# Altium PCB BI_820_Trek_GSM_GPS_hv3.PcbDoc
Units mm, origin at the board's own origin, x right, y up, seen from the top; angles counter-clockwise.
Board outline 71 x 50 mm, 2 copper layers (Top Layer, Bottom Layer); 47 components, 39 nets, 196 pads, 223 vias.
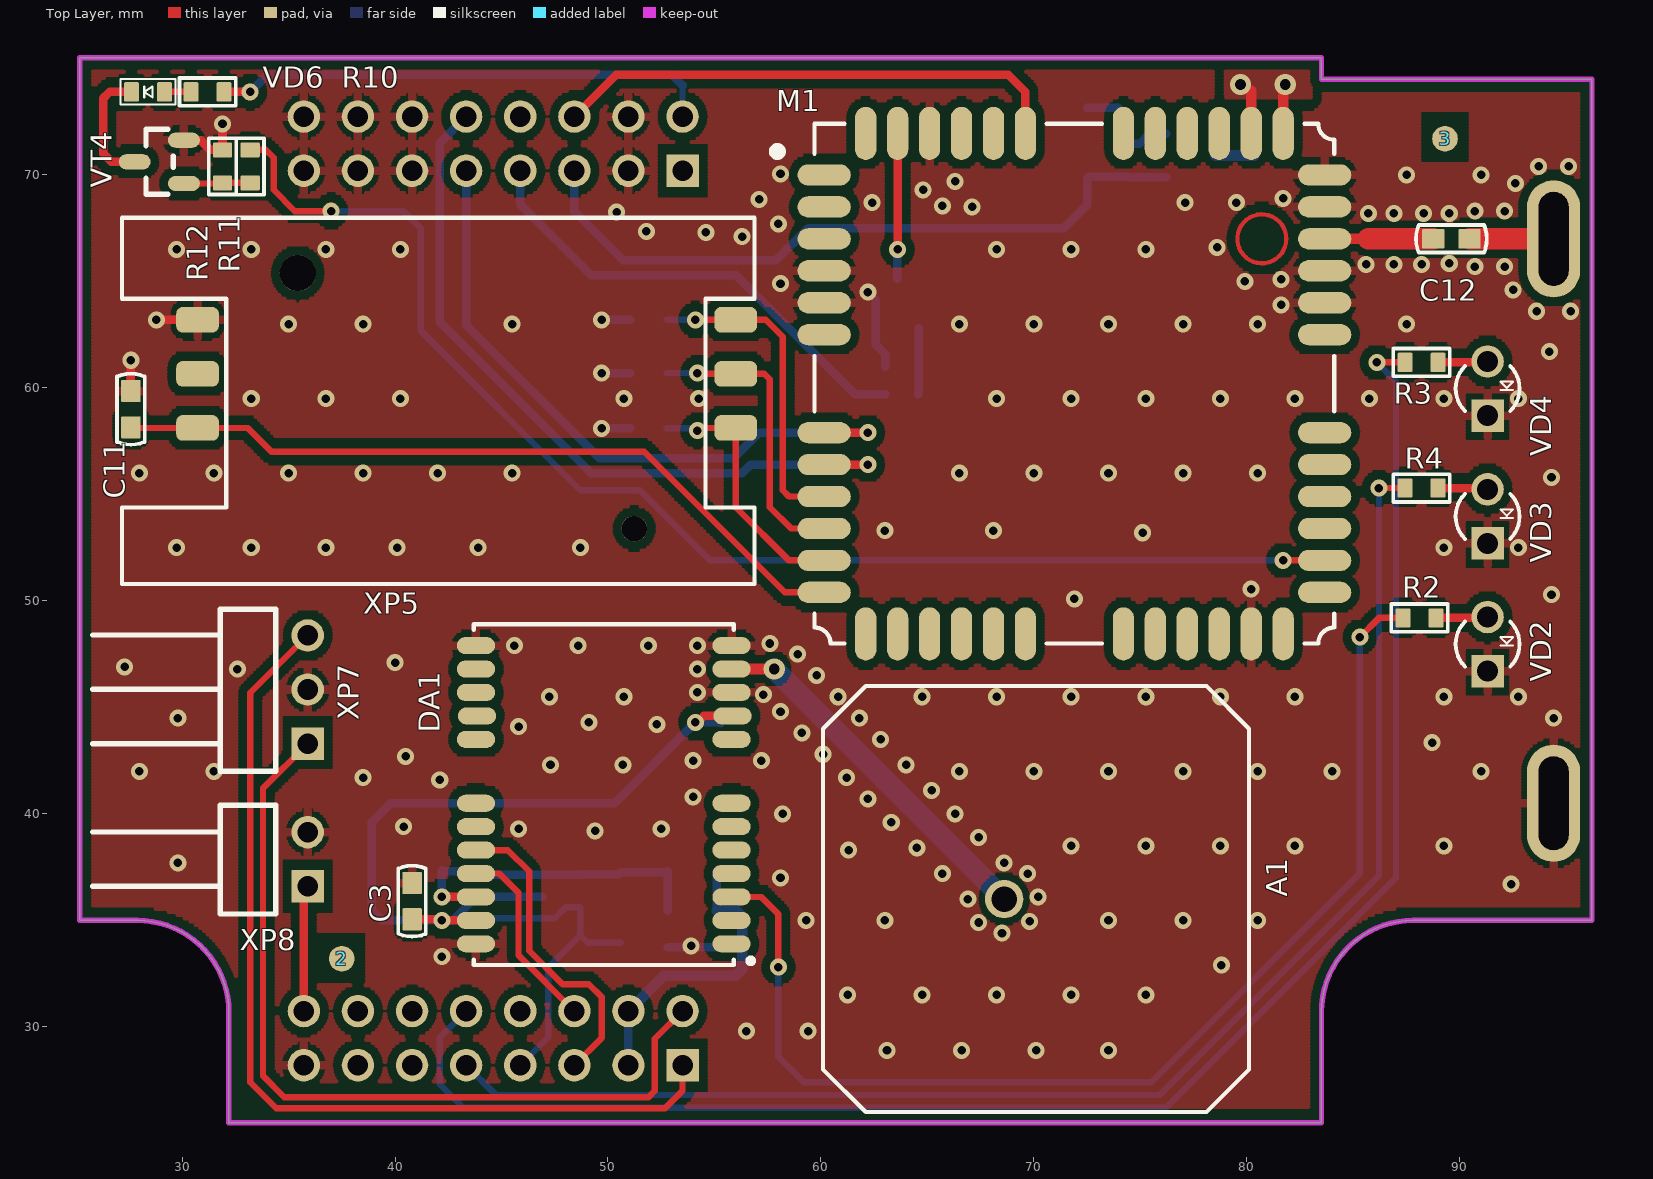
[diagram p0: Top Layer view]
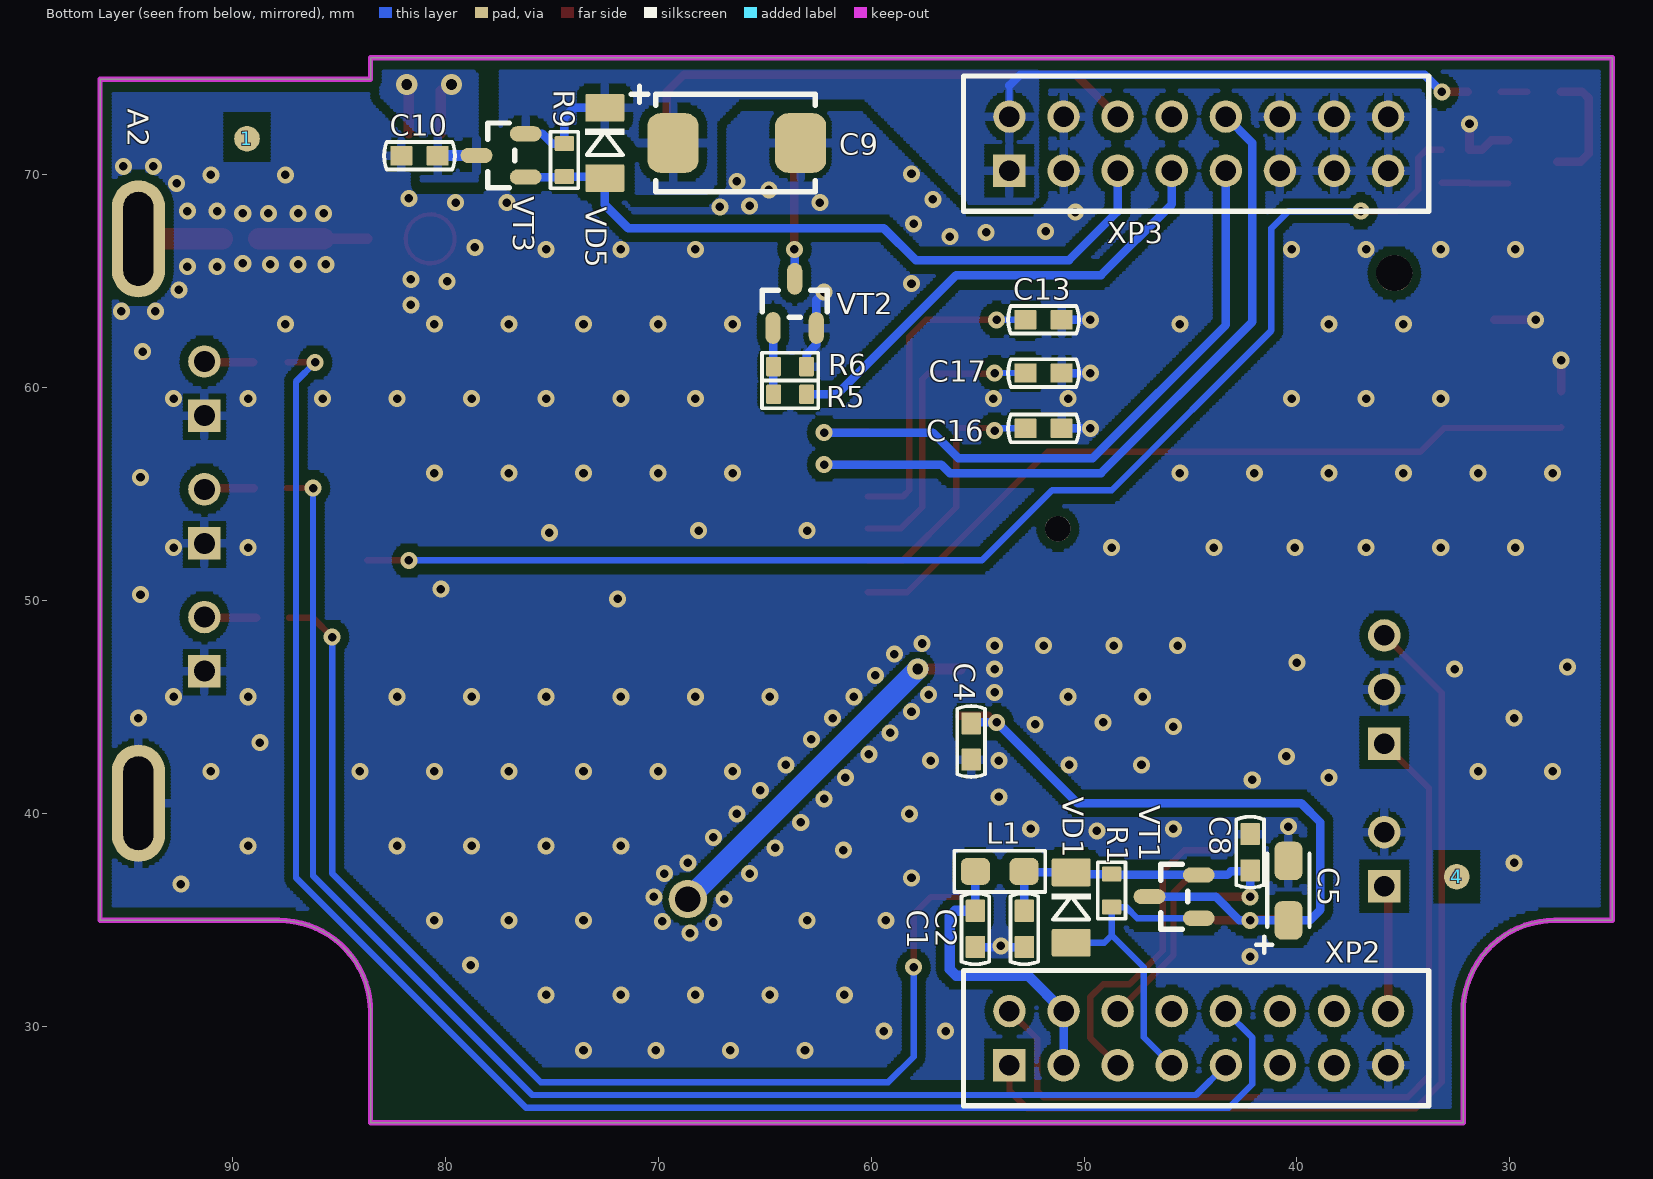
[diagram p1: Bottom Layer view, seen from below]

## Layer stack, top to bottom
Top Solder: solder mask 0.0102, Solder Resist, Dk 3.5
Top Layer: signal copper 0.0356
Dielectric1: dielectric 0.32, FR-4, Dk 4.8
Bottom Layer: signal copper 0.0356
Bottom Solder: solder mask 0.0102, Solder Resist, Dk 3.5

## Board outline
32.2,30.7 ccw(c27.9,30.7) 27.9,35 25.2,35 25.2,75.5 83.5,75.5 83.5,74.5 96.2,74.5 96.2,35 87.8,35 ccw(c87.8,30.7) 83.5,30.7 83.5,25.5 32.2,25.5

## Design rules (kind name [scope] priority, off if disabled: settings)
Clearance Clearance_MH [HasPad('Free-1') vs InPoly] p1: gap=2
Clearance Clearance_keepout [IsKeepOut] p2: gap=0.4
Clearance Clearance_RF [InNet('NetC12_1') Or InNet('NetA1_1') vs InPoly] p3: gap=0.3
Clearance Clearance_Poly [All vs InPoly] p4: gap=0.4
Clearance [All] p5: gap=0.2
ComponentClearance [All] p1: gap=0 collisioncheckmode=3 verticalgap=0 showdistances=FALSE
HoleSize [All] p1: absolutevalues=TRUE maxlimit=9 minlimit=0.025 maxpercent=80.000 minpercent=20.000
MinimumSolderMaskSliver [All] p1: minsoldermaskwidth=0.076
PlaneConnect [All] p1: planeconnectstyle=Relief reliefexpansion=0.2 reliefentries=4 reliefconductorwidth=0.254 reliefairgap=0.2
PolygonConnect PolygonConnect_Thermal [PadYSize_TopLayer > 3] p1: connectstyle=Direct reliefconductorwidth=0.254 reliefentries=4 polygonreliefangle="90 Angle" airgapwidth=0.254
PolygonConnect PolygonConnect_VIA [IsVia] p2: connectstyle=Direct reliefconductorwidth=0.254 reliefentries=4 polygonreliefangle="90 Angle" airgapwidth=0.254
PolygonConnect [All] p3: connectstyle=Relief reliefconductorwidth=0.4 reliefentries=4 polygonreliefangle="90 Angle" airgapwidth=0.254
RoutingVias [All] p1: holewidth=0.3 width=0.6 viastyle="Through Hole" minholewidth=0.3 minwidth=0.6 maxholewidth=0.5 maxwidth=1
SilkToSilkClearance [All] p1: silktosilkclearance=0
SilkToSolderMaskClearance SilkscreenOverComponentPads [IsPad] p1: minsilkscreentomaskgap=0.05 clearancetoexposedcopper=TRUE
SolderMaskExpansion SolderMaskExpansion_VIA [IsVia] p1: expansion=-25.4
SolderMaskExpansion SolderMaskExpansion_1 [IsPad And PadYSize_TopLayer < 0.4] p2: expansion=0.05
SolderMaskExpansion [All] p3: expansion=0.076
Width [All] p1: maxlimit=1.5 minlimit=0.2 preferedwidth=0.3
24 further rules are at their usual default settings.

## Classes and differential pairs
component class GPS: A1 C1 C2 C3 C4 C5 C8 DA1 L1 R1 R2 R3 R4 VD1 VD2 VD3 VD4 VT1 XP2 XP7 XP8
component class GSM: A2 C9 C10 C11 C12 C13 C16 C17 M1 R5 R6 R9 R10 R11 R12 VD5 VD6 VT2 VT3 VT4 XP3 XP5

## Components (designator, comment, footprint, x,y, rotation, side; value= is the part's Value field where it differs from the comment)
1 "Comment" REPER1.2 89.3,71.7 r180 bottom
2 "Comment" REPER1.2 37.5,33.2 r0 top
3 "Comment" REPER1.2 89.3,71.7 r0 top
4 "Comment" REPER1.2 32.5,37.05 r180 bottom
A1 "BY-GPS-204" BY-GPS-204 68.6,36 r90 top
A2 "GSM_antenna_pad" GSM_antenna_pad 94.4,67 r270 bottom
C1 "0.1 uF" CC0603-3M 55.1,34.6 r90 bottom
C2 "0.1 uF" CC0603-3M 52.8,34.6 r90 bottom
C3 "0.1 uF" CC0603-3M 40.8,35.9 r90 top
C4 "0.1 uF" CC0603-3M 55.3,43.4 r270 bottom
C5 "10uF x 6.3V" TAJ-A_M 40.4,35 r90 bottom
C8 "1 uF" CC0603-3M 42.2,38.2 r270 bottom
C9 "470uF x 6.3V" TAJ-D-1M 66.3,71.5 r180 bottom
C10 "1 uF" CC0603-3M 81.2,70.9 r180 bottom
C11 "33 pF" CC0603-3M 27.6,59 r270 top
C12 "10 pF" CC0603-3M 89.6,67 r0 top
C13 "33 pF" CC0603-3M 51.9,63.2 r0 bottom
C16 "33 pF" CC0603-3M 51.9,58.1 r0 bottom
C17 "33 pF" CC0603-3M 51.9,60.7 r0 bottom
DA1 "SL869_V2" SL868 55.8,33.9 r180 top
L1 "10 uH" RC0805-MIDI-2 55.1,37.3 r180 bottom
M1 "GL868-DUAL" GL868-DUAL 71.9,60.2 r0 top
R1 "10k" RC0603-3M 48.7,36.4 r270 bottom
R2 "330" RC0603-3M 88.1,49.2 r0 top
R3 "560" RC0603-3M 88.2,61.2 r180 top
R4 "330" RC0603-3M 88.2,55.3 r180 top
R5 "10k" RC0603-3M 63.8,59.7 r0 bottom
R6 "47k" RC0603-3M 63.8,61 r180 bottom
R9 "10k" RC0603-3M 74.4,70.7 r270 bottom
R10 "390" RC0603-3M 31.2,73.9 r0 top
R11 "10k" RC0603-3M 33.2,70.4 r270 top
R12 "47k" RC0603-3M 31.9,70.4 r90 top
VD1 "BZV55C5V6" SOD80 50.6,35.6 r270 bottom
VD2 "BL-B21V1L" LED3 91.3,46.7 r90 top
VD3 "BL-B31V1-L" LED3 91.3,52.7 r90 top
VD4 "BL-B45V1-L" LED3 91.3,58.7 r90 top
VD5 "BZV55C5V6" SOD80 72.5,71.5 r270 bottom
VD6 "LGQ971-Z" LED0603 28.4,73.9 r180 top
VT1 "IRLML6402" SOT-23(123) 44.6,35.1 r180 bottom
VT2 "BC846BLT1" SOT-23(123) 64.6,62.8 r270 bottom
VT3 "IRLML6402" SOT-23(123) 76.2,69.9 r180 bottom
VT4 "BC846BLT1" SOT-23(123) 30.1,69.6 r0 top
XP2 "PLD-16" PIN16 53.5,28.2 r180 bottom
XP3 "PLD-16" PIN16 53.5,70.2 r180 bottom
XP5 "SCV-W06A25-020" SCVW06A25020 56,63.2 r180 top
XP7 "PLS-03L" PLS-03L 35.9,43.3 r90 top
XP8 "PLS-02L" PLS-02L 35.9,36.6 r90 top

## Footprints (in the part's own frame and the unit in brackets; to place one, negate y for a bottom-side part, rotate by r counter-clockwise, add the part's x,y. Pads: shape width x height; smd on the part's side, far side on the other; paste and mask are expansions set on the pad)
BY-GPS-204 [mm]
  round 1.8 hole 1.2: 1(0,0)
  silkscreen extent -10,-11.5 10,8.5
CC0603-3M [mil]
  rrect10% 40.98x35.98 smd paste-1000: 1(-33.5,0) 2(33.5,0)
  silkscreen extent -65,-26 65,26
GL868-DUAL [mm]
  oval 2.5x1 smd: 1(-11.75,9.8) 2(-11.75,8.3) 3(-11.75,6.8) 4(-11.75,5.3) 5(-11.75,3.8) 6(-11.75,2.3) 7(-11.75,-2.3) 8(-11.75,-3.8) 9(-11.75,-5.3) 10(-11.75,-6.8) 11(-11.75,-8.3) 12(-11.75,-9.8) 25(11.75,-9.8) 26(11.75,-8.3) 27(11.75,-6.8) 28(11.75,-5.3) 29(11.75,-3.8) 30(11.75,-2.3) 31(11.75,2.3) 32(11.75,3.8) 33(11.75,5.3) 34(11.75,6.8) 35(11.75,8.3) 36(11.75,9.8)
  oval 1x2.5 smd: 13(-9.8,-11.75) 14(-8.3,-11.75) 15(-6.8,-11.75) 16(-5.3,-11.75) 17(-3.8,-11.75) 18(-2.3,-11.75) 19(2.3,-11.75) 20(3.8,-11.75) 21(5.3,-11.75) 22(6.8,-11.75) 23(8.3,-11.75) 24(9.8,-11.75) 37(9.8,11.75) 38(8.3,11.75) 39(6.8,11.75) 40(5.3,11.75) 41(3.8,11.75) 42(2.3,11.75) 43(-2.3,11.75) 44(-3.8,11.75) 45(-5.3,11.75) 46(-6.8,11.75) 47(-8.3,11.75) 48(-9.8,11.75)
  Top Layer circle w0.2: c8.8,6.8 r1.15
  silkscreen extent -14.15,-12.2 12.2,12.2
GSM_antenna_pad [mm]
  oval 5.5x2.5 hole 1.4 slot 4.4 at 0 deg: 1(0,0) 2(26.5,0)
LED3 [mil]
  rect 60x60 hole 39: 1(0,0)
  round 60 hole 39: 2(100,0)
  silkscreen extent 8,-59 92,59
LED0603 [mm]
  rrect20% 0.71x0.91 smd paste-25.4: 1(-0.775,0) 2(0.775,0)
  silkscreen extent -1.3,-0.6 1.3,0.6
PIN16 [mil]
  rect 60x60 hole 38: 1(0,0)
  round 60 hole 38: 2(0,100) 3(100,0) 4(100,100) 5(200,0) 6(200,100) 7(300,0) 8(300,100) 9(400,0) 10(400,100) 11(500,0) 12(500,100) 13(600,0) 14(600,100) 15(700,0) 16(700,100)
  silkscreen extent -85,-75 775,175
PLS-02L [mil]
  rect 60x60 hole 38: 1(0,0)
  round 60 hole 38: 2(100,0)
  silkscreen extent -51,59 150,398
PLS-03L [mil]
  rect 60x60 hole 38: 1(0,0)
  round 60 hole 38: 2(100,0) 3(200,0)
  silkscreen extent -51,59 248,398
RC0603-3M [mm]
  rrect20% 0.71x0.91 smd paste-25.4: 1(-0.775,0) 2(0.775,0)
  silkscreen extent -1.32,-0.65 1.33,0.65
RC0805-MIDI-2 [mil]
  rrect50% 54x50 smd: 1(0,0) 2(90,0)
  silkscreen extent -39,-38 129,38
REPER1.2 [mm]
  round 1.2 smd paste-25.4 mask-25.4: 1(0,0)
  Top Layer pour cut-out: -1.2,-1.2 1.2,-1.2 1.2,1.2 -1.2,1.2
SCVW06A25020 [mm]
  rrect50% 2x1.2 smd: 1(0,0) 2(0,2.54) 3(0,5.08) 4(25.273,0) 5(25.273,2.54) 6(25.273,5.08)
  round 1.2 hole 1.2 unplated: 7(4.769,9.81)
  round 1.7 hole 1.7 unplated: 8(20.569,-2.19)
  silkscreen extent -0.88,-4.79 28.82,12.41
SL868 [mm]
  oval 1.8x0.8 smd: 1(0,0) 2(0,-1.1) 3(0,-2.2) 4(0,-3.3) 5(0,-4.4) 6(0,-5.5) 7(0,-6.6) 8(0,-9.6) 9(-0.05,-10.7) 10(0,-11.8) 11(0,-12.9) 12(0,-14) 13(12,-14) 14(12,-12.9) 15(12,-11.8) 16(11.95,-10.7) 17(12,-9.6) 18(12,-6.6) 19(12,-5.5) 20(12,-4.4) 21(12,-3.3) 22(12,-2.2) 23(12,-1.1) 24(12,0)
  silkscreen extent -1.03,-15 12.1,1
SOD80 [mm]
  rrect10% 1.3x1.83 smd paste-25.4: 1(1.651,0) 2(-1.651,0)
  silkscreen extent -0.66,-0.91 0.56,0.91
SOT-23(123) [mil]
  oval 59.06x28.07 smd: 1(-0.5,0) 2(-0.5,80) 3(-91.5,40)
  silkscreen extent -70,-20 -20,100
TAJ-A_M [mm]
  rrect50% 1.8x1.3 smd: 1(0,0) 2(2.794,0)
  silkscreen extent -1.52,-0.99 3.12,1.52
TAJ-D-1M [mm]
  rrect50% 2.4x2.8 smd: 1(-2.997,0) 2(2.997,0)
  silkscreen extent -4.95,-2.29 3.68,2.67

## Part data
A1: "Passive GPS Antenna"
C1 C2 C3 C4 C8 C10 C11 C12 C13 C16 C17: library part CC0603, "CC0603"
C5: library part TAJ-A, "TAJ-A"
C9: library part TAJ-D, "TAJ-D"
L1: library part L0805, "L0805"
R1 R2 R3 R4 R5 R6 R9 R10 R11 R12: library part RC0603, "RC0603"
VD1 VD5: library part BZV55C5V1, "Zener Voltage Regulator Diode"
VD2 VD3 VD4: library part LED_3, "LED_3"
VD6: library part LED_0603, "LED_0603"
VT1 VT3: "HEXFET Power MOSFET"

## Via types
v1: diameter 0.8, hole 0.4, Top Layer to Bottom Layer, 220 vias
v2: diameter 1, hole 0.5, Top Layer to Bottom Layer, 3 vias

## Nets (pads, with @x,y where several pads share a name; then routed paths per layer and width w, separated by ;. In a path a pad name is that pad's centre, name@x,y a point inside that pad or via, vN(x,y) a via of type N, cw(c..) or ccw(c..) an arc to the next point about the centre after c; other vN are vias at no path point)
+3V: C1.2 L1.1 XP2.3 XP2.4 | length 14.3
  Bottom Layer w0.4: XP2.3 XP2.4 ; C1.2 L1.1
  Bottom Layer w0.5: XP2.4 52.62,32.4 56,32.4 56.3,32.7 56.3,35.2 56.049,35.451 C1.2
GND: A2.2 C1.1 C2.1 C3.2 C4.2 C5.2 C8.1 C9.2 C10.1 C11.1 C13.1 C16.1 C17.1 DA1.10 DA1.12 DA1.13 DA1.24 M1.4 M1.5 M1.23 M1.32 M1.33 M1.35 M1.36 M1.46 R6.2 R12.2 VD2.1 VD3.1 VD4.1 VT2.2 VT4.2 XP2.15 XP3.3 XP3.4 XP3.11 XP3.12 XP3.13 XP3.14 XP3.15 XP3.16 XP5.4 XP7.2 XP8.2 | length 16.8
  Top Layer w0.4: C11.1 v1(27.6,61.3) ; v1(28.8,63.2) XP5.4 ; VT4.2 30.868,71.632 31.325,71.175 R12.2 v1(31.9,72.4)
  Bottom Layer w0.4: v1(49.7,58.1) C16.1 ; v1(49.7,60.7) C17.1 ; v1(49.7,63.2) C13.1 ; C2.1 C1.1 ; v1(62.2,64.5) 62.568,64.132 VT2.2 62.568,62.032 63.025,61.575 R6.2
  other v1: 63.1,28.9 66.6,28.9 70.1,28.9 73.5,28.9 56.5,29.8 59.4,29.8 61.25,31.5 64.75,31.5 68.25,31.5 71.75,31.5 75.25,31.5 78.8,32.9 42.2,33.3 53.9,33.8 68.5,34.4 67.4,34.9 69.8,34.95 59.3,35 63,35 73.5,35 77,35 80.5,35 66.9,36 70.2,36.1 92.4,36.7 58.1,37 65.7,37.2 69.7,37.2 29.8,37.7 68.6,37.7 61.3,38.3 64.5,38.4 71.75,38.5 75.25,38.5 78.75,38.5 82.25,38.5 89.25,38.5 67.4,38.9 49.4,39.2 45.8,39.3 52.5,39.3 40.4,39.4 63.3,39.6 58.2,40 66.3,40 62.2,40.7 54,40.8 65.2,41.1 42.1,41.6 38.5,41.7 61.2,41.7 28,42 31.5,42 66.5,42 70,42 73.5,42 77,42 80.5,42 84,42 91,42 47.3,42.3 50.7,42.3 64,42.3 54,42.5 57.2,42.5 40.5,42.7 60.1,42.8 88.7,43.35 62.8,43.5 59.1,43.8 45.8,44.1 52.3,44.2 49.1,44.3 29.8,44.5 61.8,44.5 94.4,44.5 58.1,44.8 47.25,45.5 50.75,45.5 60.8,45.5 64.75,45.5 68.25,45.5 71.75,45.5 75.25,45.5 78.75,45.5 82.25,45.5 89.25,45.5 92.75,45.5 57.3,45.6 54.2,45.7 59.8,46.5 32.6,46.8 54.2,46.8 27.3,46.9 40,47.1 58.9,47.5 45.6,47.9 48.6,47.9 51.9,47.9 54.2,47.9 57.6,48 71.9,50.1 94.3,50.3 80.2,50.55 29.75,52.5 33.25,52.5 36.75,52.5 40.1,52.5 43.9,52.5 48.7,52.5 89.25,52.5 92.75,52.5 75.1,53.2 63,53.3 68.1,53.3 94.3,55.8 28,56 31.5,56 35,56 38.5,56 42,56 45.5,56 66.5,56 70,56 73.5,56 77,56 80.5,56 33.25,59.5 36.75,59.5 40.25,59.5 50.75,59.5 54.25,59.5 68.25,59.5 71.75,59.5 75.25,59.5 78.75,59.5 82.25,59.5 85.75,59.5 89.25,59.5 92.75,59.5 94.2,61.7 35,63 38.5,63 45.5,63 66.5,63 70,63 73.5,63 77,63 80.5,63 87.5,63 93.6,63.6 95.2,63.6 81.6,63.9 92.5,64.6 58.1,64.9 79.9,65 81.6,65.1 90.7,65.7 92.1,65.7 85.6,65.8 86.9,65.8 88.2,65.8 89.5,65.85 29.75,66.5 33.25,66.5 36.75,66.5 40.25,66.5 68.25,66.5 71.75,66.5 75.25,66.5 78.6,66.6 56.3,67.1 54.6,67.3 51.8,67.35 58,67.7 85.7,68.2 86.9,68.2 88.3,68.2 89.5,68.2 50.4,68.25 90.7,68.3 92.1,68.3 67.1,68.5 65.7,68.55 62.4,68.7 77.1,68.7 79.5,68.7 57.1,68.85 81.7,68.9 64.8,69.3 92.6,69.6 66.3,69.7 87.5,70 91,70 58.1,70.05 93.7,70.4 95.1,70.4
GPS_ON: R1.2 VD1.1 VT1.1 XP2.7 | length 14.9
  Bottom Layer w0.3: VT1.1 47.5,35.1 48.025,35.625 R1.2 48.7,34.3 ; XP2.7 47.2,29.52 47.2,32.8 48.7,34.3 ; VD1.1 49.051,33.949 48.7,34.3
GPS_RX: DA1.21 XP2.6 | length 9
  Top Layer w0.3: DA1.21 44.9,37.2 45.8,36.3 45.8,33.36 XP2.6
GPS_TX: DA1.20 XP2.5 | length 14.7
  Top Layer w0.3: DA1.20 45.3,38.3 46.3,37.3 46.3,33.567 47.867,32 49.1,32 49.7,31.4 49.7,29.48 XP2.5
GPS_VCC: C3.1 C4.1 C5.1 DA1.9 DA1.23 VT1.3 | length 36.1
  Top Layer w0.4: C3.1 42.151,35.049 v1(42.2,35) DA1.23 ; v1(54.1,44.3) 54.2,44.3 54.5,44.6 DA1.9
  Bottom Layer w0.4: VT1.3 43.816,36.116 42.7,35 v1(42.2,35) C5.1 39.4,35 38.9,35.5 38.9,39.6 39.8,40.5 50.3,40.5 v1(54.1,44.3) 55.251,44.3 C4.1
GSM_ON: R9.2 VD5.1 VT3.1 XP3.5 | length 33
  Bottom Layer w0.4: XP3.5 48.42,68.28 50.7,66 57.9,66 59.4,67.5 71.4,67.5 72.5,68.6 VD5.1 72.576,69.925 R9.2 74.425,69.9 VT3.1
NetA1_1: A1.1 DA1.11 | length 17.3
  Top Layer w0.5: DA1.11 v2(57.8,46.8)
  Bottom Layer w1: v2(57.8,46.8) A1.1
NetA2_1: A2.1 C12.2 | length 3.9
  Top Layer w1: C12.2 A2.1
NetC10_2: C10.2 M1.37 M1.38 VT3.3 | length 5.8
  Top Layer w0.5: M1.38 80.2,73.95 ; M1.37 v2@81.7,73.95
  Bottom Layer w0.5: VT3.3 80.333,70.916 C10.2
  other v2: 79.7,74.25 81.8,74.25
NetC12_1: C12.1 M1.34 | length 5.1
  Top Layer w0.5: M1.34 85.7,67
  Top Layer w1: 85.7,67 C12.1
NetDA1_3: DA1.3 R2.1 | length 54.6
  Top Layer w0.3: DA1.3 57.2,36.1 58,35.3 v1(58,32.8) ; v1(85.3,48.3) 86.2,49.2 R2.1
  Bottom Layer w0.3: v1(58,32.8) 58,28.6 59.2,27.4 75.5,27.4 85.3,37.2 v1(85.3,48.3)
NetM1_26: M1.26 R11.1 | length 62.1
  Top Layer w0.3: R11.1 33.925,71.175 34.3,70.8 34.3,69.3 35.3,68.3 v1(37,68.3) ; v1(81.7,51.9) M1.26
  Bottom Layer w0.3: v1(37,68.3) 40.4,68.3 41.2,67.5 41.2,62.7 48.7,55.2 51.5,55.2 54.8,51.9 v1(81.7,51.9)
NetM1_47: M1.47 VT2.3 | length 6.8
  Top Layer w0.4: v1(63.6,66.5) M1.47
  Bottom Layer w0.4: VT2.3 63.584,66.484 v1(63.6,66.5)
NetR2_2: R2.2 VD2.2 | length 2.5
  Top Layer w0.4: R2.2 91.26,49.2 VD2.2 ; VD2.2@91.26,48.8 VD2.2@91.3,48.84
NetR3_1: R3.1 VD4.2 | length 2.4
  Top Layer w0.4: R3.1@89,61.2 90.94,61.2 VD4.2@91.3,60.84
NetR4_1: R4.1 VD3.2 | length 2.4
  Top Layer w0.4: R4.1 91.24,55.3 VD3.2 ; VD3.2@91.24,54.9 VD3.2@91.3,54.84
NetR5_1: R5.1 XP3.7 | length 22.4
  Bottom Layer w0.4: XP3.7 45.88,68.62 49.2,65.3 56,65.3 61.6,59.7 R5.1
NetR5_2: R5.2 R6.1 VT2.1 | length 3.1
  Bottom Layer w0.4: R5.2 64.6,59.725 VT2.1
NetR10_1: R10.1 VD6.1 | length 1.3
  Top Layer w0.3: VD6.1 R10.1
NetR11_2: R11.2 R12.1 VT4.1 | length 3.1
  Top Layer w0.3: VT4.1 31.875,69.6 R12.1 R11.2
NetVD6_2: VD6.2 VT4.3 | length 5.7
  Top Layer w0.4: VD6.2 26.6,73.9 26.3,73.6 26.3,71 26.684,70.616 VT4.3
NetXP2_8: XP2.8
PWRMON: M1.43 XP3.6 | length 24.3
  Top Layer w0.4: XP3.6 50.38,74.7 68.8,74.7 69.6,73.9 M1.43
RTC_VCC: C2.2 C8.2 DA1.22 L1.2 R1.1 VD1.2 VT1.2 | length 15.5
  Top Layer w0.4: v1(42.2,36.1) DA1.22
  Bottom Layer w0.4: v1(42.2,36.1) C8.2 42.249,37.3 43.1,37.3 43.268,37.132 VT1.2 48.657,37.132 R1.1 50.524,37.175 VD1.2 52.765,37.251 L1.2 52.814,35.465 C2.2
RXD: M1.8 XP3.10 | length 35.4
  Top Layer w0.4: M1.8 v1(62.2,56.4)
  Bottom Layer w0.4: XP3.10 42.1,71.5 42.1,63.1 49.2,56 56.3,56 56.7,56.4 v1(62.2,56.4)
RXD0: XP2.2 XP7.1 | length 39.7
  Top Layer w0.3: XP7.1 33.8,41.2 33.8,27.7 34.8,26.7 51.9,26.7 52.2,27 52.2,29.44 XP2.2
RXD_AUX: M1.44
SIMCLK: C16.2 M1.11 XP5.3 | length 12.2
  Top Layer w0.3: v1(54.2,58) 54.32,58.12 XP5.3 56,54.4 58.5,51.9 M1.11
  Bottom Layer w0.3: C16.2 54.1,58.1 v1(54.2,58)
SIMIO: C11.2 M1.12 XP5.6 | length 35.8
  Top Layer w0.3: C11.2 27.629,58.12 XP5.6 33.08,58.12 34.2,57 51.7,57 58.3,50.4 M1.12
SIMRST: C17.2 M1.10 XP5.2 | length 13.9
  Top Layer w0.3: v1(54.2,60.7) 54.24,60.66 XP5.2 57.34,60.66 57.6,60.4 57.6,54.4 58.6,53.4 M1.10
  Bottom Layer w0.3: C17.2 v1(54.2,60.7)
SIMVCC: C13.2 M1.9 XP5.1 | length 15.1
  Top Layer w0.3: v1(54.1,63.2) XP5.1 57.4,63.2 58.2,62.4 58.2,55.2 58.5,54.9 M1.9
  Bottom Layer w0.3: C13.2 v1(54.1,63.2)
STAT_LED: R4.2 XP2.9 | length 67.1
  Top Layer w0.3: v1(86.2,55.3) R4.2
  Bottom Layer w0.3: XP2.9 44.74,26.8 75.9,26.8 86.2,37.1 v1(86.2,55.3)
TST: XP2.16 XP8.1 | length 6
  Top Layer w0.4: XP2.16 35.72,36.42 XP8.1
  Bottom Layer w0.4: XP2.16@35.68,30.7 XP2.16
TXD: M1.7 XP3.9 | length 31.2
  Top Layer w0.4: M1.7 v1(62.2,57.9)
  Bottom Layer w0.4: XP3.9 43.34,62.96 49.6,56.7 55.9,56.7 57.1,57.9 v1(62.2,57.9)
TXD0: XP2.1 XP7.3 | length 44.4
  Top Layer w0.3: XP7.3 33.2,45.68 33.2,27.4 34.423,26.177 52.677,26.177 53.5,27 XP2.1
TXD_AUX: M1.45
V_SD: R3.2 XP2.10 | length 79.7
  Top Layer w0.3: v1(86.1,61.2) R3.2@87.4,61.2
  Bottom Layer w0.3: XP2.10 42.1,29.5 42.1,27.3 43.2,26.2 76.2,26.2 87,37 87,60.3 v1(86.1,61.2)
VCC: C9.1 R9.1 R10.2 VD5.2 VT3.2 XP3.1 XP3.2 | length 28.8
  Top Layer w0.4: R10.2 v1(33.2,73.9)
  Bottom Layer w0.3: XP3.2 53.5,74.2
  Bottom Layer w0.4: v1(33.2,73.9) 34,74.7 53,74.7 53.5,74.2 ; VD5.2 73.949,73.151 74.4,72.7 R9.1 74.975,71.475 75.432,71.932 VT3.2
pads on no net: 1.1 2.1 3.1 4.1 DA1.1 DA1.2 DA1.4 DA1.5 DA1.6 DA1.7 DA1.8 DA1.14 DA1.15 DA1.16 DA1.17 DA1.18 DA1.19 M1.1 M1.2 M1.3 M1.6 M1.13 M1.14 M1.15 M1.16 M1.17 M1.18 M1.19 M1.20 M1.21 M1.22 M1.24 M1.25 M1.27 M1.28 M1.29 M1.30 M1.31 M1.39 M1.40 M1.41 M1.42 M1.48 XP2.11 XP2.12 XP2.13 XP2.14 XP3.8 XP5.5 XP5.7 XP5.8

## Polygon pours and split planes (outlines as drawn)
NetC10_2 on Top Layer "Top Layer-No Net" (hatched Horizontal grid 0.15 track 0.2, remove dead copper, pour order 2): 79,75 79,73.6 83,73.6 83,75
GND on Top Layer "Top Layer-No Net" (hatched Horizontal grid 0.15 track 0.2, remove dead copper, pour order 10): 25.8,26 95.7,26 95.7,74 95.599,74.1 83.578,74.1 83.578,75 25.8,75
NetC10_2 on Bottom Layer "Top Layer-No Net" (hatched Horizontal grid 0.15 track 0.2, remove dead copper, pour order 4): 78.5,69.6 81.1,69.6 81.1,71.8 82.9,73.6 83,73.7 83,75 78.8,75 78.5,74.7
VCC on Bottom Layer "Top Layer-No Net" (hatched Horizontal grid 0.15 track 0.2, remove dead copper, pour order 6): 71,69 71,71.5 71.5,72 74.9,72 75.5,71.4 76.9,71.4 77.4,71.9 77.4,75 52.2,75 52.2,69 52.6,68.6 55.3,68.6 60.2,73.5 66.3,73.5 67.3,72.5 67.3,69.6 67.9,69
GND on Bottom Layer "Top Layer-No Net" (hatched Horizontal grid 0.15 track 0.2, remove dead copper, pour order 8): 25.8,26 95.7,26 95.7,74 83.679,74 83.578,74.1 83.578,75 25.8,75

## Keep-outs
Keep-Out Layer:
  the board outline again, w0.254

## Other copper
Bottom Layer:
  pour cut-out: 78.2,69.4 75,69.4 75,71.1 75.1,71.2 78.2,71.2

## Silkscreen, mask and mechanical layers (free items; w line width, h text height)
comment_bot:
  text "BI_820_Trek_GSM_GPS_hv3 BOTTOM" at 81.1,22.8 h1.52
comment_top:
  lines w0.2: 31.088,77.8 31.588,77.3 ; 31.088,83.7 31.388,83.7 ; 31.288,77.8 31.488,77.6 31.588,77.6 31.688,77.6 31.888,77.8 ; 31.588,76.9 31.588,77.8 ; 31.588,79.4 31.588,83.7 ; 32.088,77.8 31.588,77.3 ; 32.7,89 46.3,89 ; 33.588,77.8 34.088,77.3 ; 33.788,77.8 33.988,77.6 34.088,77.6 34.188,77.6 34.388,77.8 ; 34.088,76.9 34.088,77.8 ; 34.088,79.4 34.088,83.7 ; 34.1,79.4 46.5,79.4 ; 34.3,83.7 40.3,83.7 ; 34.588,77.8 34.088,77.3 ; 34.588,83.7 34.288,83.7 ; 38.8,82.8 39.3,83.7 ; 38.9,80.3 39.3,79.4 ; 39.3,83.6 39.3,83.7 ; 39.7,80.3 39.3,79.4 ; 39.8,82.8 39.3,83.7 ; 43.4,88.1 43.9,89 ; 43.5,80.3 43.9,79.4 ; 43.9,88.9 43.9,89 ; 44.3,80.3 43.9,79.4 ; 44.4,88.1 43.9,89 ; 60.1,92.5 60.7,90.6 ; 60.4,86.8 60.9,88.7 ; 60.7,94.3 60.7,90.6 ; 60.9,85 60.9,88.7 ; 61.2,92.5 60.7,90.6 ; 61.5,86.8 60.9,88.7 ; 67,95.4 71.7,90.7 ; 70.4,91.3 71.7,90.7 ; 71,92 71.7,90.7 ; 71.9,88.9 71.9,77.9 72.9,77.9 72.9,88.9 ; 71.9,90.5 71.9,91.5 72.9,91.5 72.9,90.5 ; 73.7,92.1 73.1,90.8 ; 74.4,91.5 73.1,90.8 ; 75.2,80.3 73.3,80.8 ; 75.2,81.4 73.3,80.8 ; 77.8,95.5 73.1,90.8 ; 83.6,80.8 73.3,80.8 ; 31.388,83.7 34.288,83.7 ; 31.388,83.7 31.388,87.6 cw(c32.838,87.55) 34.288,87.6 34.288,83.7 ; 31.588,77.3 31.588,77.3 ; 34.088,77.3 34.088,77.3 ; 39.3,79.4 39.3,83.7 ; 39.3,83.7 39.3,83.7 ; 39.3,83.7 39.3,83.7 ; 43.9,79.4 43.9,89 ; 43.9,89 43.9,89 ; 43.9,89 43.9,89 ; 71.7,90.7 71.7,90.7 ; 73.1,90.8 73.1,90.8 ; 29.188,77.8 37.388,77.8 37.388,79.4 29.188,79.4 29.188,77.8 ; 52,88.9 74.1,88.9 74.1,90.5 52,90.5 52,88.9
  lines w0.254: 68.397,92.769 ccw(c68.35,93.75) 69.3,94 ; 75.369,94.303 ccw(c76.35,94.35) 76.6,93.4
  text "Перед пайкой обкусить выводы XP7, XP8 до высоты 0,5мм от нижней стороны платы." at 29.1,103 h2
  text "При установке A1 снять защитную пленку." at 41.7,100.6 h2
  text "Установка A2" at 55.5,97.8 h2
  text "TOP" at 59.527,94.744 h1.52
  text "Установка VD2 - VD4" at 30.6,90.1 h2
  text "BOTTOM" at 57.9,83.6 h1.52
  text "8.8" at 43.2,82.9 h2 r90
  text "Сторона с печатным" at 84.9,81.3 h1.52
  text "3.5" at 38.5,80.5 h2 r90
  text "рисунком" at 85,79.8 h1.52
  text "BI_820_Trek_GSM_GPS_hv3 TOP" at 38.5,22.9 h1.52